# Altium PCB XPIRL_IR_1V0.PcbDoc
Units mil, origin at the board's own origin, x right, y up, seen from the top; angles counter-clockwise.
Board outline 830.11 x 810.11 mil, 2 copper layers (Top Layer, Bottom Layer); 20 components, 12 nets, 49 pads, 15 vias.
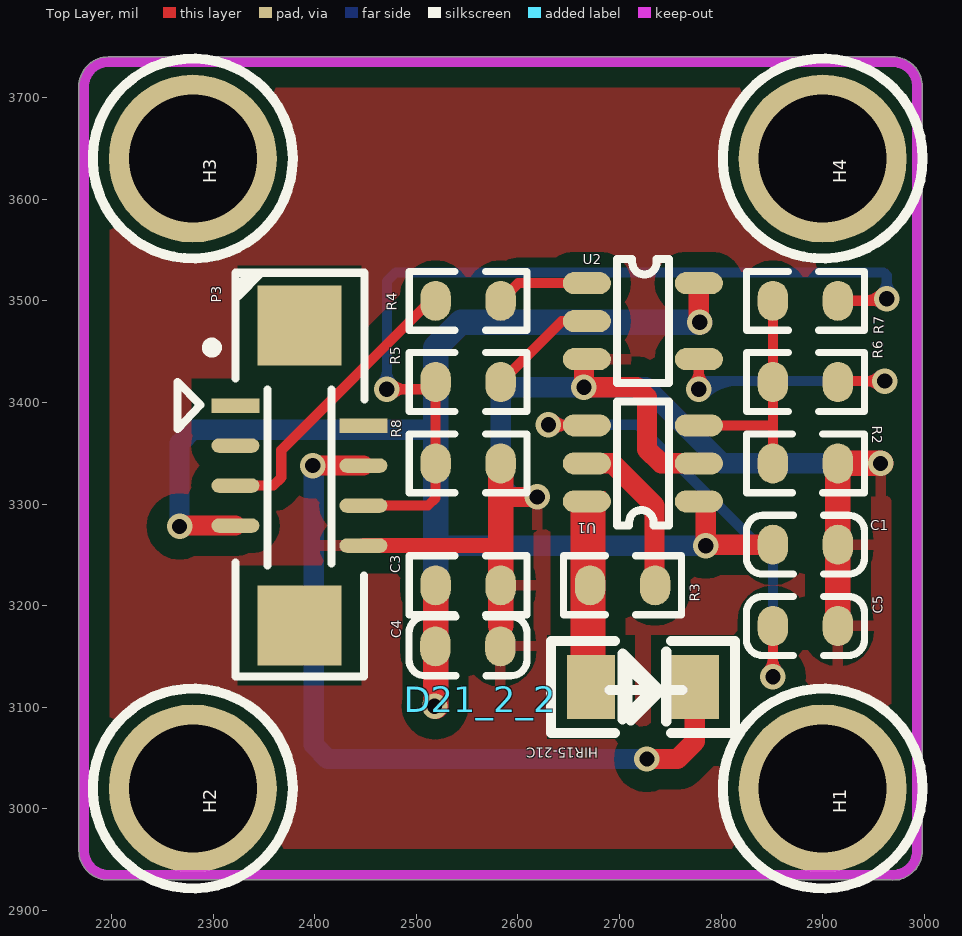
[diagram p0: Top Layer view]
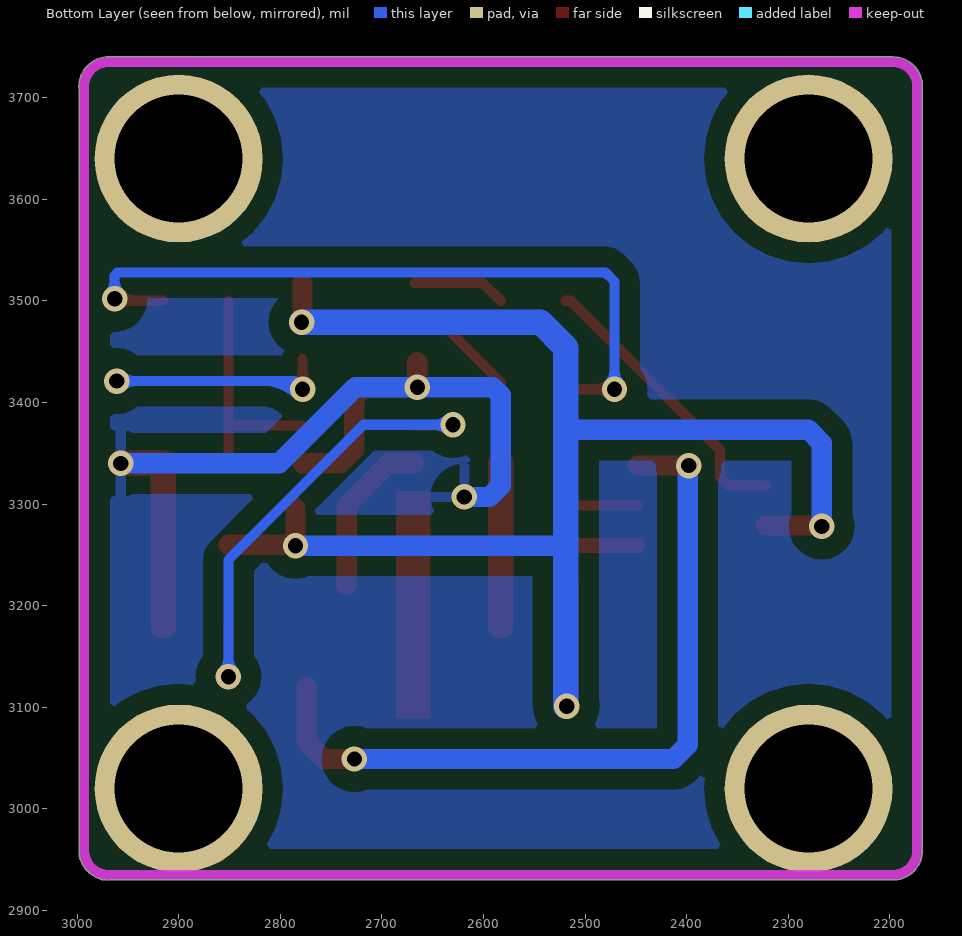
[diagram p1: Bottom Layer view, seen from below]

## Layer stack, top to bottom
Top Layer: signal copper 1.4
Dielectric: dielectric 12.6, FR-4, Dk 4.8
Bottom Layer: signal copper 1.4

## Board outline
2194.58,2930 ccw(c2195,2935) 2196,2930.09 ccw(c2197,2935) 2197,2929.99 2966.8,2929.99 ccw(c2969,2959) 2971.2,2929.99 2974,2929.99 ccw(c2974,2935) 2977.09,2931.05 ccw(c2969,2959) 2998,2956.58 ccw(c2993,2957) 2998.01,2957 2998.01,3708.8 ccw(c2969,3711) 2998.1,3711 ccw(c2969,3711) 2971.42,3740 ccw(c2971,3735) 2971,3740.01 2199.2,3740.01 ccw(c2197,3711) 2168,3713.42 ccw(c2173,3713) 2167.99,3713 2167.99,2961.2 ccw(c2197,2959)

## Design rules (kind name [scope] priority, off if disabled: settings)
Clearance [All] p1: gap=10
ComponentClearance [All] p1: gap=0 collisioncheckmode=3 verticalgap=0 showdistances=FALSE
MinimumSolderMaskSliver [All] p1: minsoldermaskwidth=0
PolygonConnect [All] p1: connectstyle=Relief reliefconductorwidth=10 reliefentries=4 polygonreliefangle="90 Angle"
RoutingVias [All] p1: holewidth=28 width=50 viastyle="Through Hole" minholewidth=10 minwidth=10 maxholewidth=28 maxwidth=50
SilkToSilkClearance [All] p1: silktosilkclearance=0
SilkscreenOverComponentPads [All] p1: minsilkscreentomaskgap=0
SolderMaskExpansion [All] p1: expansion=4
Width [All] p1: maxlimit=100 minlimit=10 preferedwidth=10
24 further rules are at their usual default settings.

## Classes and differential pairs
component class sch_Camera: C1 C3 C4 C5 HIR15-21C P3 R2 R3 R4 R5 R6 R7 R8 U1 U2

## Components (designator, comment, footprint, x,y, rotation, side; value= is the part's Value field where it differs from the comment)
C1 "0.1uF" 0603C_N 2883,3260 r180 top
C3 "4.7uF" 0603R_N 2551,3220 r180 top
C4 "0.1uF" 0603C_N 2550.84,3160 r180 top
C5 "10pF" 0603C_N 2883,3180 r180 top
D21_2_2 "SK34" DO-214 2563,3108 r0 top (schematic designator D21)
H1 "CON1" PAD_M3_D350_450 2900,3020 r90 top
H2 "CON1" PAD_M3_D350_450 2280,3020 r90 top
H3 "CON1" PAD_M3_D350_450 2280,3640 r90 top
H4 "CON1" PAD_M3_D350_450 2900,3640 r90 top
HIR15-21C "LIMA" 1206R 2723,3120 r0 top
P3 "FPC_8H" FPC_8H 2300,3400 r270 top
R2 "4.7k" 0603R_N 2883,3340 r180 top
R3 "100R" 0603R_N 2703,3220 r0 top
R4 "0R" 0603R_N 2551,3500 r180 top
R5 "0R" 0603R_N 2551,3420 r180 top
R6 "0R" 0603R_N 2883,3420 r0 top
R7 "0R_NC" 0603R_N 2883,3500 r0 top
R8 "4.7k" 0603R_N 2551,3340 r180 top
U1 "TPS22918DBVT" SOT23-6_P0.95X2.4_L3W4.2H1.1 2723,3340 r180 top
U2 "SN74LVC1G32" SOT23-5_P0.95X2.4_L3W4.2H1.1 2723,3480 r0 top

## Footprints (in the part's own frame and the unit in brackets; to place one, negate y for a bottom-side part, rotate by r counter-clockwise, add the part's x,y. Pads: shape width x height; smd on the part's side, far side on the other; paste and mask are expansions set on the pad)
0603C_N [mil]
  oval 30x39.37 smd: 1(-32,0) 2(32,0)
  silkscreen extent -58,-29 58,29, body extent -31,-16 31,16, height 31
0603R_N [mil]
  oval 30x39.37 smd: 1(-32,0) 2(32,0)
  silkscreen extent -58,-29 58,29, body extent -31,-16 31,16, height 16
1206R [mm]
  rect 1.2x1.6 smd: 1(-1.3,0) 2(1.3,0)
  silkscreen extent -2.3,-1.15 2.3,1.15, body extent -1.46,-0.81 1.45,0.8, height 0.55
DO-214 [mil]
  silkscreen extent 127,-22 199,47
FPC_8H [mm]
  rect 0.36x1.2 smd: 1(0.079,0.559) 2(0.579,3.759)
  oval 0.36x1.2 smd: 3(1.079,0.559) 4(1.579,3.759) 5(2.079,0.559) 6(2.579,3.759) 7(3.079,0.559) 8(3.579,3.759)
  rect 2x2.1 smd: 9(-1.921,2.159) 10(5.579,2.159)
  silkscreen extent -3.24,-0.89 6.85,3.79
PAD_M3_D350_450 [mm]
  round 4.2 / inner round 4 / far side round 4.2 hole 3.2: 1(0,0)
  silkscreen extent -2.5,-2.5 2.5,2.5
SOT23-5_P0.95X2.4_L3W4.2H1.1 [mm]
  oval 1.2x0.55 smd: 1(-1.4,0.95) 2(-1.4,0) 3(-1.4,-0.95) 4(1.4,-0.95) 5(1.4,0.95)
  silkscreen extent -0.65,-1.55 0.65,1.55
SOT23-6_P0.95X2.4_L3W4.2H1.1 [mm]
  oval 1.2x0.55 smd: 1(-1.4,0.95) 2(-1.4,0) 3(-1.4,-0.95) 4(1.4,-0.95) 5(1.4,0) 6(1.4,0.95)
  silkscreen extent -0.65,-1.55 0.65,1.55

## Part data
C1 C3 C4 C5: library part Cap, "Capacitor"
D21_2_2: library part "Diode 1N4007", "1 Amp General Purpose Rectifier"
HIR15-21C: library part LED, "发光二级管"
P3: library part "Header 8H", "Header, 8-Pin, Right Angle"
R2 R3 R4 R5 R6 R7 R8: library part Resistor, "Resistor"

## Via types
v1: diameter 25, hole 15, Top Layer to Bottom Layer, 15 vias

## Nets (pads, with @x,y where several pads share a name; then routed paths per layer and width w, separated by ;. In a path a pad name is that pad's centre, name@x,y a point inside that pad or via, vN(x,y) a via of type N, cw(c..) or ccw(c..) an arc to the next point about the centre after c; other vN are vias at no path point)
5V0: C1.2 C3.2 C4.2 P3.7 U1.1 U2.5 | length 1536.1
  Top Layer w20: v1@2267.79,3278.79 P3.7 ; v1@2778.12,3479 U2.5 ; v1(2785,3259) U1.1@2785,3295.72 ; v1@2786,3260 C1.2
  Top Layer w25: v1@2519,3101 C3.2
  Bottom Layer w20: v1(2267,3278) 2267,3360 2280,3373 2519,3373 ; 2525,3259 v1(2785,3259)
  Bottom Layer w25: v1@2519,3101 2519,3373 2519,3454 2544,3479 v1(2779,3479)
  other v1: 2518,3101
GND: C1.1 C3.1 C4.1 C5.1 P3.8 R2.1 R8.1 U1.2 U2.3 | length 1267.7
  Top Layer w15: P3.8 2583,3259.1
  Top Layer w20: 2585,3307 v1(2619,3307) ; U2.3@2665,3439.72 v1(2665,3415) 2717,3415 2727,3405 2727,3354 2741,3340 U1.2
  Top Layer w25: 2583,3180 C3.1 R8.1 ; C5.1 C1.1 R2.1 v1(2957,3340)
  Bottom Layer w20: v1(2619,3307) 2594,3307 2583,3318 2583,3407 2591,3415 v1(2665,3415) 2726,3415 2801,3340 v1(2957,3340)
GPIO_PIN3: P3.6 R5.2 R7.2 R8.2 | length 1014.9
  Top Layer w10: P3.6 2511.47,3298.47 2519,3306 R5.2 ; v1(2471,3413) R5.2@2512,3413 ; v1@2476.3,3407.7 cw(c2489.11,3394.89) 2489.11,3413 cw(c2489.11,3431.11) v1@2476.3,3418.3 ; R7.2 v1@2961,3500 ; 2940.07,3500 ccw(c2940.07,3524.93) v1@2957.7,3507.3 ; 2949.72,3500 cw(c2949.72,3488.72) v1@2957.7,3496.7
  Bottom Layer w10: v1@2465.7,3418.3 ccw(c2452.89,3431.11) 2471,3431.11 ccw(c2489.11,3431.11) v1@2476.3,3418.3 ; v1(2471,3413) 2471,3519 2480,3528 2960,3528 2963,3525 v1(2963,3502) ; v1@2957.7,3507.3 ccw(c2944.89,3520.11) 2963,3520.11 ccw(c2981.11,3520.11) v1@2968.3,3507.3
LEDOUT0: P3.5 R4.2 | length 296.5
  Top Layer w10: P3.5@2330.41,3318.16 P3.5 2359.16,3318.16 2367,3326 2367,3353 2514,3500 R4.2
LIMA_CATH1: HIR15-21C.2 P3.4 | length 765.9
  Top Layer w20: v1(2398,3337.84) P3.4 ; v1(2727,3049) 2757,3049 2774.18,3066.18 HIR15-21C.2
  Bottom Layer w20: v1@2399,3338 2399,3063 2413,3049 v1@2726,3049
NetC5_2: C5.2 U1.4 | length 592.7
  Top Layer w10: v1@2630,3377.4 U1.4 ; v1@2635.3,3372.7 cw(c2646.66,3361.34) U1.4@2646.66,3377.4 ; v1@2635.3,3383.3 ccw(c2649.55,3397.55) U1.4@2649.55,3377.4 ; v1@2845.7,3135.3 ccw(c2832.89,3148.11) 2851,3148.11 ccw(c2869.11,3148.11) v1@2856.3,3135.3 ; v1(2851,3130) C5.2
  Bottom Layer w10: v1(2630,3378) 2718,3378 2851,3245 v1(2851,3130) ; v1@2635.3,3372.7 cw(c2648.11,3359.89) 2648.11,3378 cw(c2648.11,3396.11) v1@2635.3,3383.3 ; v1@2845.7,3135.3 ccw(c2832.89,3148.11) 2851,3148.11 ccw(c2869.11,3148.11) v1@2856.3,3135.3
NetHIR15-21C_1: HIR15-21C.1 R3.1 U1.6
NetR3_2: R3.2 U1.5 | length 162.5
  Top Layer w20: U1.5 2693,3340 2734.5,3298.5 2734.5,3220.5 R3.2
NetR4_1: R4.1 U2.1 | length 92.1
  Top Layer w10: R4.1 2600.4,3517.4 U2.1
NetR5_1: R5.1 U2.2 | length 109.7
  Top Layer w10: R5.1 2643,3480 U2.2
NetR6_2: R6.2 U2.4 | length 406.5
  Top Layer w10: v1@2772.7,3418.3 ccw(c2759.89,3431.11) 2778,3431.11 ccw(c2796.11,3431.11) v1@2783.3,3418.3 ; v1(2778,3413) U2.4@2778,3442.48 ; R6.2@2908,3421 v1(2961,3421) ; v1@2955.7,3415.7 ccw(c2942.89,3402.89) 2942.89,3421 ccw(c2942.89,3439.11) v1@2955.7,3426.3
  Bottom Layer w10: v1@2776.23,3414.77 cw(c2791.28,3399.72) 2791.28,3421 ; v1(2778,3413) 2786,3421 v1(2961,3421) ; v1@2783.3,3407.7 cw(c2815.42,3375.58) 2815.42,3421 ; v1@2955.7,3415.7 ccw(c2942.89,3402.89) 2942.89,3421 ccw(c2942.89,3439.11) v1@2955.7,3426.3
YOUT: R2.2 R6.1 R7.1 U1.3 | length 231.3
  Top Layer w10: U1.3 2849.4,3377.4 ; R2.2 R6.1 R7.1
pads on no net: H1.1 H2.1 H3.1 H4.1 P3.1 P3.2 P3.3 P3.9 P3.10

## Polygon pours and split planes (outlines as drawn)
GND on Top Layer "Top Layer-No Net" (solid): 2173,3713 2195,3735 2199,3735 2971,3735 2993,3713 2993,3709 2993,2957 2971,2935 2967,2935 2195,2935 2173,2957 2173,2961
GND on Bottom Layer "Top Layer-No Net" (solid): 2173,3713 2177,3713 2199,3735 2971,3735 2971,3731 2993,3709 2993,2957 2989,2957 2967,2935 2195,2935 2195,2939 2173,2961

## Keep-outs
Keep-Out Layer:
  lines w10: 2967,2935 ccw(c2969,2959) 2993,2957 2993,3709 ccw(c2969,3711) 2971,3735 2199,3735 ccw(c2197,3711) 2173,3713 2173,2961 ccw(c2197,2959) 2195,2935 2975,2935

## Other copper
Top Layer:
  rectangle net NetHIR15-21C_1: 2652,3089 2686,3313

## Dimensions
2173,3713 to 2993,3709 on Top Layer
2195,2935 to 2199,3735 on Top Layer

## Text inside footprints (layer, text, board x,y; h text height)
H2: Mechanical 18 "H1" at 2285.9,3013.21 h9.84 r90
H3: Mechanical 18 "H1" at 2285.9,3633.21 h9.84 r90
H4: Mechanical 18 "H1" at 2905.9,3633.21 h9.84 r90